# EAGLE board GSRv3.0 (EAGLE 7.4.0)
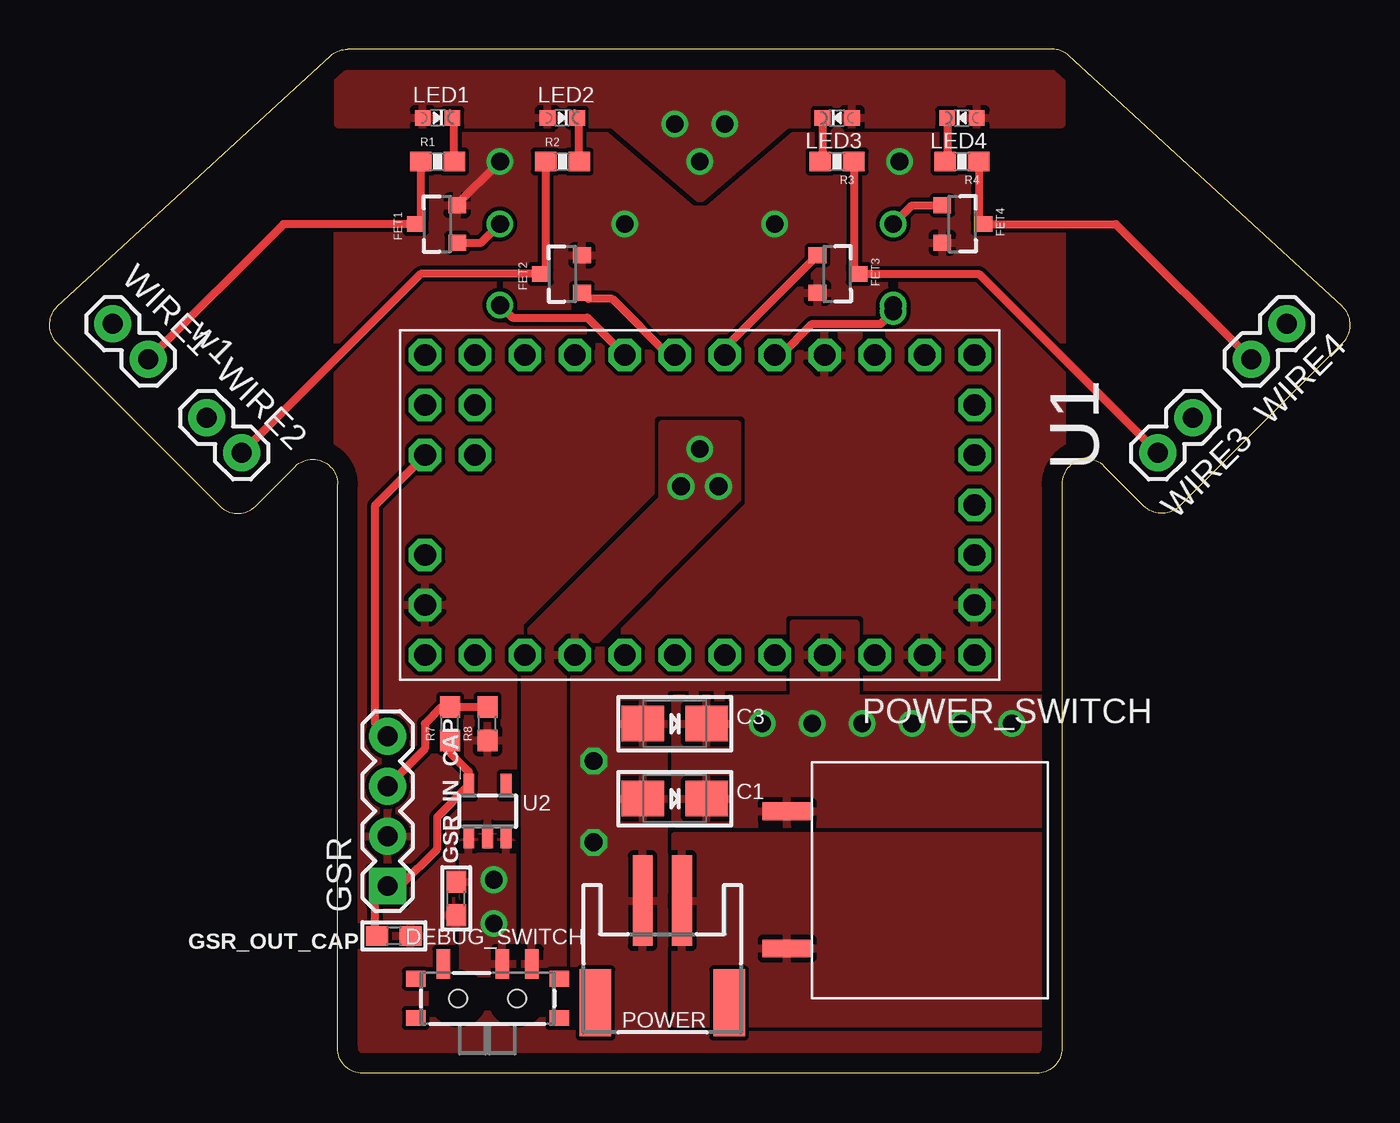
[diagram p0: board, top side]
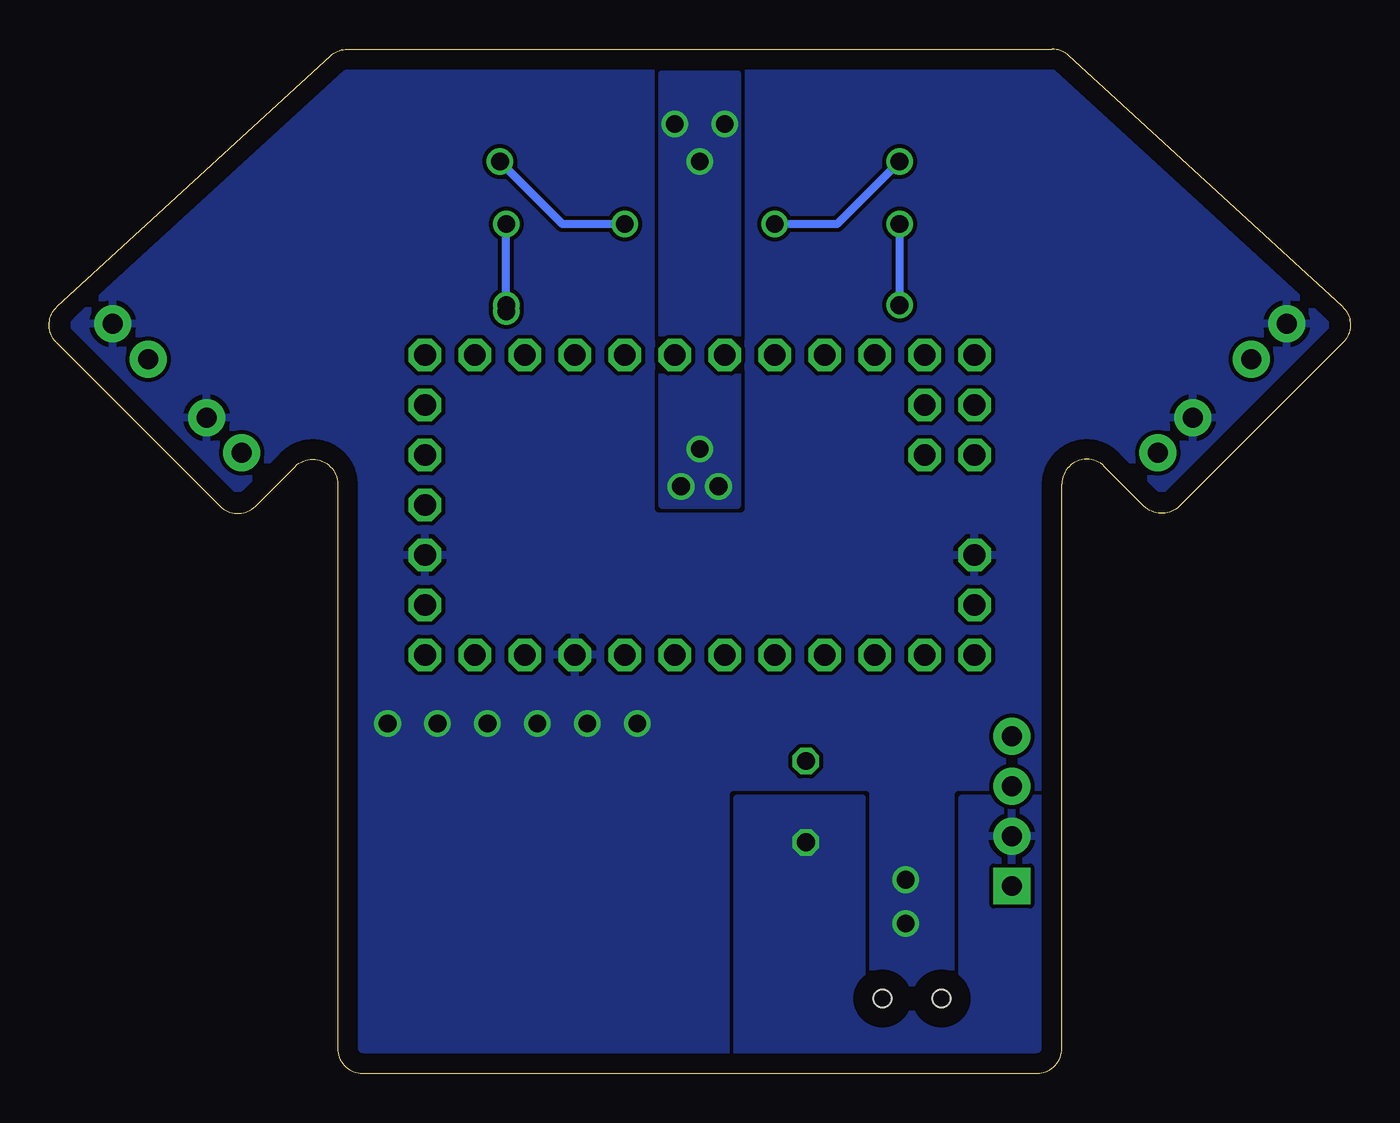
[diagram p1: board, bottom side, seen from below]

Size 66.18 x 52.07 mm. Coordinates in mm from the lower left corner, seen from the top.
Outline: 0.41,39 14.31,51.74 arc-43 15.17,52.07 51.01,52.07 arc-43 51.87,51.74 65.77,39 arc-92 65.81,37.16 57.48,28.84 arc-90 55.69,28.84 53.67,30.85 arc135 51.5,29.95 51.5,1.27 arc-90 50.23,0 15.94,0 arc-90 14.67,1.27 14.67,29.95 arc135 12.51,30.85 10.49,28.84 arc-90 8.7,28.84 0.37,37.16 arc-92 0.41,39
Copper layers (1*16): Top 0.035mm / dielectric 1.5mm / Bottom 0.035mm
Design rules "default": minimum track width 10mil, minimum drill 24mil, track to track 8mil, track to pad 8mil, pad to pad 8mil, via to via 8mil, smd to smd 8mil, copper to edge 40mil, drill to drill 8mil, minimum pad ring 10mil, minimum via ring 8mil, stop-mask expansion 4mil, vias tented up to drill 0mil, thermal gap 10mil

## Footprints (pad centres in the part's own frame; a part is rotated, then mirrored left to right if it is on the bottom)
EIA3528-21/B-W = smd 2.15 x 1.8: + 1.625,0; - -1.625,0
SPST_SMT_19192 = smd 0.7 x 1.5: A -2.25,1.75; B 0.75,1.75; C 2.25,1.75 | smd 1 x 0.8: GND1 -3.65,1; GND2 -3.65,-1; GND3 3.65,1; GND4 3.65,-1 | hole 0.9: -1.5,0; 1.5,0
SOT23-3 = smd 0.8 x 0.9: 1 -0.95,-1; 2 0.95,-1; 3 0,1.1
1X04 = drill 1.016 pad 1.88 square: 1 0,0 | drill 1.016 pad 1.88: 2 2.54,0; 3 5.08,0; 4 7.62,0
0603 = smd 1.1 x 1: 1 -0.85,0; 2 0.85,0
CHIPLED_0603_NOOUTLINE = smd 0.8 x 0.8: A 0,-0.75; C 0,0.75
JSTPH2 = smd 1 x 4.6: 1 -1,-3.7; 2 1,-3.7 | smd 1.6 x 3.4: NC1 -3.4,1.5; NC2 3.4,1.5
PUSH_BUTTON = smd 2.5 x 0.9: PIN1 -13.97,-0.644; PIN2 -13.97,-7.62
0603-RES = smd 1.1 x 1: 1 -0.85,0; 2 0.85,0
ARDUINO_MINI = drill 1.1 octagon: 5V@1 2.54,15.24; 5V@2 7.62,7.62; 5V@3 2.54,-12.7; 9V 7.62,15.24; A0 7.62,-2.54; A1 7.62,0; A2 7.62,2.54; A3 7.62,5.08; A4 -5.08,-12.7; A5 -2.54,-12.7; A6 -5.08,-10.16; A7 -2.54,-10.16; D2 -7.62,5.08; D3 -7.62,2.54; D4 -7.62,0; D5 -7.62,-2.54; D6 -7.62,-5.08; D7 -7.62,-7.62; D8 -7.62,-10.16; D9 -7.62,-12.7; D10 7.62,-12.7; D11 7.62,-10.16; D12 7.62,-7.62; D13 7.62,-5.08; GND@1 -7.62,7.62; GND@2 5.08,15.24; GND@3 7.62,12.7; GND@4 5.08,-12.7; RST@1 -7.62,10.16; RST@2 -5.08,15.24; RST@3 7.62,10.16; RX@1 -7.62,12.7; RX@2 0,15.24; TX@1 -7.62,15.24; TX@2 -2.54,15.24
SOT23-5 = smd 0.55 x 1.2: 1 -0.95,-1.3; 2 0,-1.3; 3 0.95,-1.3; 4 0.95,1.3; 5 -0.95,1.3
1X02 = drill 1.016 pad 1.88: 1 0,0; 2 2.54,0

## Placement (x,y rotation side)
C1  [EIA3528-21/B-W]  31.82,13.97 0 top
C3  [EIA3528-21/B-W]  31.82,17.78 0 top
DEBUG_SWITCH  [SPST_SMT_19192]  22.29,3.81 0 top
FET1  MPSA42  [SOT23-3]  19.75,43.18 90 top
FET2  MPSA42  [SOT23-3]  26.1,40.64 90 top
FET3  MPSA42  [SOT23-3]  40.07,40.64 270 top
FET4  MPSA42  [SOT23-3]  46.42,43.18 270 top
GSR  [1X04]  17.21,9.53 90 top
GSR_IN_CAP  1uF  [0603]  20.71,8.89 90 top
GSR_OUT_CAP  1uF  [0603]  17.53,6.99 180 top
LED1  [CHIPLED_0603_NOOUTLINE]  19.75,48.58 270 top
LED2  [CHIPLED_0603_NOOUTLINE]  26.1,48.58 270 top
LED3  [CHIPLED_0603_NOOUTLINE]  40.07,48.58 90 top
LED4  [CHIPLED_0603_NOOUTLINE]  46.42,48.58 90 top
POWER  [JSTPH2]  31.18,5.08 180 top
POWER_SWITCH  PUSH_BUTTON  [PUSH_BUTTON]  51.5,13.97 0 top
R1  330  [0603-RES]  19.75,46.35 0 top
R2  330  [0603-RES]  26.1,46.35 0 top
R3  330  [0603-RES]  40.07,46.35 180 top
R4  330  [0603-RES]  46.42,46.35 180 top
R7  1K  [0603]  20.39,17.78 90 top
R8  1K  [0603]  22.29,17.78 90 top
U1  ARDUINO_MINI  [ARDUINO_MINI]  31.82,28.89 270 top
U2  [SOT23-5]  22.29,13.34 0 top
WIRE1  [1X02]  3.24,38.1 315 top
WIRE2  [1X02]  8.01,33.34 315 top
WIRE3  [1X02]  58.17,33.34 225 top
WIRE4  [1X02]  62.93,38.1 225 top

## Library data of the parts
C1 C3 DEBUG_SWITCH GSR_IN_CAP GSR_OUT_CAP LED1-LED4 POWER U2 = microbuilder
FET1-FET4 = SparkFun-DiscreteSemi; PROD_ID: TRANS-09116
GSR WIRE1-WIRE4 = SparkFun-Connectors
POWER_SWITCH U1 = myParts
R1-R4 = SparkFun-Passives
R7 R8 = SparkFun-Resistors; PROD_ID: RES-08609

## Nets
9V: U1.9V
AIN0: U1.D6
AIN1: U1.D7
DEBUG_VCC: DEBUG_SWITCH.C LED1.A LED2.A LED3.A LED4.A U1.D13
FET1: FET1.1 U1.D5
FET2: FET2.1 U1.D4
FET3: FET3.1 U1.D3
FET4: FET4.1 U1.D2
GND: C1.- C3.- FET1.2 FET2.2 FET3.2 FET4.2 GSR.2 GSR_IN_CAP.1 GSR_OUT_CAP.1 POWER.2 R8.1 U1.GND@1 U1.GND@2 U1.GND@3 U1.GND@4 U2.2
GSR_SIG: GSR.4 U1.A5
GSR_VCC: GSR.1 GSR_OUT_CAP.2 R7.1 U2.5
GSR_VSS: GSR.3 R7.2 R8.2
N$1: LED1.C R1.2
N$2: LED2.C R2.2
N$3: LED3.C R3.2
N$4: LED4.C R4.2
VBAT: C1.+ C3.+ DEBUG_SWITCH.B GSR_IN_CAP.2 POWER_SWITCH.PIN1 U1.5V@1 U1.5V@2 U1.5V@3 U2.1 U2.3 WIRE1.1 WIRE2.1 WIRE3.1 WIRE4.1
VIN: POWER.1 POWER_SWITCH.PIN2
WIRE1: FET1.3 R1.1 WIRE1.2
WIRE2: FET2.3 R2.1 WIRE2.2
WIRE3: FET3.3 R3.1 WIRE3.2
WIRE4: FET4.3 R4.1 WIRE4.2

## Tracks (layer width: path | path; a pad name or v marks a point on that pad's centre or on a via)
DEBUG_VCC  (via drill 0.9)
  other vias: 33.09,31.75 32.14,29.84 34.04,29.84 33.09,46.35 31.82,48.26 34.36,48.26
  pour Bottom: 34.99,28.89 34.99,50.8 31.18,50.8 31.18,28.89
  pour Top: 33.09,44.45 37.53,48.26 51.5,48.26 51.5,50.8 14.67,50.8 14.67,48.26 28.64,48.26
  pour Top: 24.2,5.08 24.2,21.59 26.1,21.59 26.1,5.08
  pour Top: 31.18,33.02 34.99,33.02 34.99,29.21 26.1,20.32 23.56,20.32 23.56,21.59 31.18,29.21
FET1  (via drill 0.9)
  Top 0.406: FET1.1 21.98,42.23 v22.93,43.18 | v22.93,39.05 23.56,38.42 27.37,38.42 U1.D5
  Bottom 0.406: v22.93,43.18 v22.93,39.05
FET2
  Top 0.406: U1.D4 31.5,36.51 28.64,39.37 27.42,39.37 FET2.1
FET3
  Top 0.406: U1.D3 34.36,36.88 FET3.1
FET4  (via drill 0.9)
  Top 0.406: U1.D2 37.22,36.51 38.8,38.1 42.3,38.1 v42.93,38.73 | v42.93,43.18 43.88,44.13 FET4.1
  Bottom 0.406: v42.93,38.73 v42.93,43.18
GND  (via drill 0.9)
  Top 0.406: FET1.2 20.75,44.18 v22.93,46.35
  Bottom 0.406: v29.28,43.18 26.1,43.18 v22.93,46.35 | v36.9,43.18 40.07,43.18 v43.25,46.35
  other vias: 27.69,11.75 27.69,15.88
  pour Top (rank 3): 14.67,58.42 51.5,58.42 51.5,-6.35 14.67,-6.35
  pour Bottom: 12.13,13.97 19.75,13.97 19.75,5.08 24.83,5.08 24.83,13.97 31.18,13.97 31.18,-3.81 12.13,-3.81
GSR_SIG
  Top 0.406: GSR.4 16.58,17.78 16.58,28.89 U1.A5
GSR_VCC
  Top 0.406: R7.1 20.07,16.61 21.34,15.34 U2.5 19.75,13.05 19.75,11.43 17.85,9.53 GSR.1 16.58,8.89 16.58,7.09 GSR_OUT_CAP.2
GSR_VSS
  Top 0.406: R8.2 R7.2 19.97,18.63 19.12,17.78 19.12,16.51 GSR.3
N$1
  Top 0.406: R1.2 20.6,48.48 LED1.C
N$2
  Top 0.406: R2.2 26.95,48.48 LED2.C
N$3
  Top 0.406: LED3.C 39.32,46.45 R3.2
N$4
  Top 0.406: LED4.C 45.67,46.45 R4.2
N$6  (via drill 0.9)
  other vias: 42.93,39.05
N$7  (via drill 0.9)
  other vias: 22.93,39.05
N$10  (via drill 0.9)
  other vias: 22.93,43.18
N$11  (via drill 0.9)
  other vias: 42.93,43.18
VBAT  (via drill 0.9)
  other vias: 22.61,9.84 22.61,7.62 41.34,17.78 38.8,17.78 36.26,17.78 43.88,17.78 46.42,17.78 48.96,17.78
  pour Bottom (rank 2): -6.92,55.88 76.9,55.88 76.9,-2.54 -6.92,-2.54
  pour Top: 51.5,19.05 41.03,19.05 41.03,22.86 37.85,22.86 37.85,19.05 31.82,19.05 31.82,12.7 51.5,12.7
  pour Top: 23.56,11.75 21.02,11.75 21.02,5.08 23.56,5.08
VIN
  pour Top: 51.5,12.07 31.82,12.07 31.82,2.54 51.5,2.54
WIRE1
  Top 0.406: WIRE1.2 11.92,43.18 FET1.3 18.9,43.43 R1.1
WIRE2
  Top 0.406: WIRE2.2 18.9,40.64 FET2.3 25.25,40.89 R2.1
WIRE3
  Top 0.406: WIRE3.2 47.28,40.64 FET3.3 40.92,40.89 R3.1
WIRE4
  Top 0.406: WIRE4.2 54.26,43.18 FET4.3 47.27,43.43 R4.1

## Text on the board
tSilk: w1